# Altium PCB PCB1.PcbDoc
Units mil, origin at the board's own origin, x right, y up, seen from the top; angles counter-clockwise.
Board outline 6000 x 4000 mil, 2 copper layers (Top Layer, Bottom Layer); 11 components, 7 nets, 29 pads, 0 vias.
Unrouted connection lines stored in the file: 16.
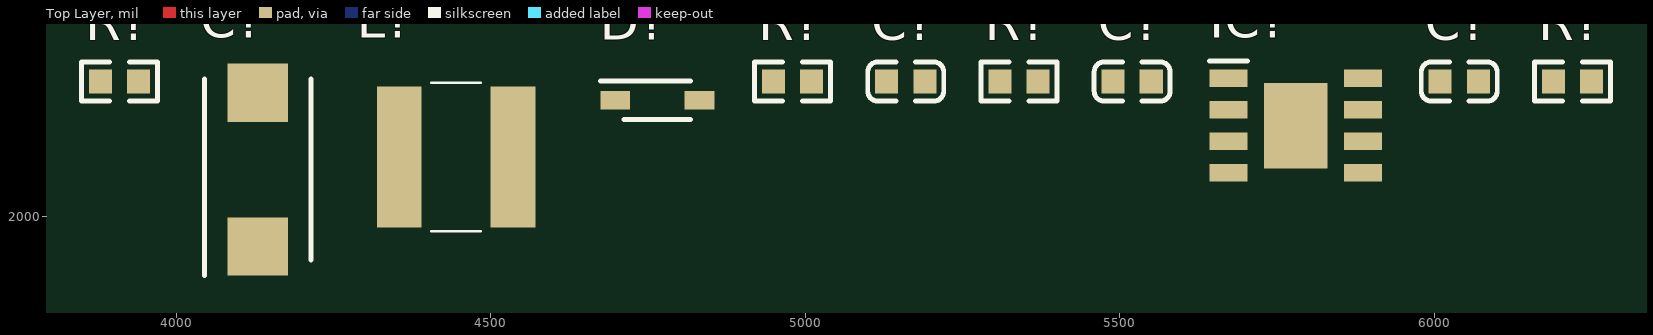
[diagram p0: Top Layer view]
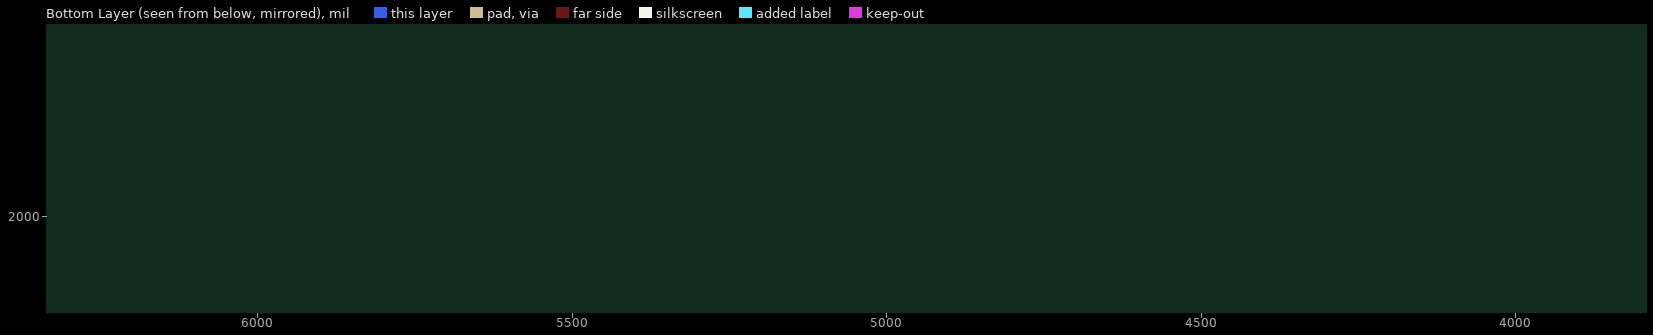
[diagram p1: Bottom Layer view, seen from below]

## Layer stack, top to bottom
Top Solder: solder mask 0.4, Solder Resist, Dk 3.5
Top Layer: signal copper 1.4
Dielectric 1: dielectric 12.6, FR-4, Dk 4.8
Bottom Layer: signal copper 1.4
Bottom Solder: solder mask 0.4, Solder Resist, Dk 3.5

## Board outline
1000,1000 7000,1000 7000,5000 1000,5000

## Design rules (kind name [scope] priority, off if disabled: settings)
Clearance [All] p1: gap=10 ignorepadtopadclearanceinfootprint=FALSE except(0: Arc-Hole Track-Hole SMDPad-Hole THPad-Hole Via-Hole Fill-Hole Poly-Hole Region-Hole Text-Hole)
PolygonConnect [All] p1: connectstyle=Relief reliefconductorwidth=10 reliefentries=4 polygonreliefangle="90 Angle" airgapwidth=10
RoutingVias [All] p1: holewidth=28 width=50 viastyle="Through Hole" minholewidth=28 minwidth=50 maxholewidth=28 maxwidth=50
SolderMaskExpansion [All] p1: expansion=4
Width [All] p1: maxlimit=10 minlimit=10 preferedwidth=10
30 further rules are at their usual default settings.

## Classes and differential pairs
component class Sheet1: C? D? IC? L? R?

## Components (designator, comment, footprint, x,y, rotation, side; value= is the part's Value field where it differs from the comment)
C? "6.8nF (682) 10% 50V" 0603_C 5159.69,2215 r0 top
C? "10uF 4.5V tan" CAPPM7343X310N 4129.69,2075 r90 top
C? "10nF (103) 10% 50V" 0603_C 5519.69,2215 r0 top
C? "100nF (104) 10% 50V" 0603_C 6039.69,2215 r0 top
D? "B130LAW-7-F" SOD3716X145N 4764.69,2185 r0 top
IC? "MP1484EN-LF" SOIC127P600X170-9N 5779.69,2145 r0 top
L? "1040 10UH 5A" 74404064470 4444.69,2095 r0 top
R? "100KΩ (1003) ±1%" 0603_R 6219.69,2215 r0 top
R? "44.2K" 0603_R 4979.69,2215 r0 top
R? "6.8KΩ (6801) ±1%" 0603_R 5339.69,2215 r0 top
R? "10KΩ (1002) ±1%" 0603_R 3909.68,2215 r0 top

## Footprints (in the part's own frame and the unit in brackets; to place one, negate y for a bottom-side part, rotate by r counter-clockwise, add the part's x,y. Pads: shape width x height; smd on the part's side, far side on the other; paste and mask are expansions set on the pad)
0603_C [mm]
  rect 0.93x0.98 smd: 1(-0.77,0) 2(0.77,0)
  silkscreen extent -1.53,-0.79 1.54,0.79, body extent -0.8,-0.4 0.8,0.4, height 0.3
0603_R [mm]
  rect 0.93x0.98 smd: 1(-0.77,0) 2(0.77,0)
  silkscreen extent -1.53,-0.79 1.54,0.79, body extent -0.85,-0.4 0.85,0.4, height 0.56
74404064470 [mm]
  rect 1.8x5.7 smd: 1(-2.3,0) 2(2.3,0)
  silkscreen extent -1,-3 1,3, body extent -3.02,-3 3.02,3, height 4.1
CAPPM7343X310N [mm]
  rect 2.35x2.45 smd: 1(-3.1,0) 2(3.1,0)
  silkscreen extent -4.28,-2.15 3.65,2.15, body extent -3.65,-2.15 3.65,2.15, height 3.1
SOD3716X145N [mm]
  rect 1.2x0.75 smd: 1(-1.7,0) 2(1.7,0)
  silkscreen extent -2.3,-0.77 1.35,0.77, body extent -1.85,-0.77 1.85,0.77, height 1.45
SOIC127P600X170-9N [mm]
  rect 1.525x0.7 smd: 1(-2.712,1.905) 2(-2.712,0.635) 3(-2.712,-0.635) 4(-2.712,-1.905) 5(2.712,-1.905) 6(2.712,-0.635) 7(2.712,0.635) 8(2.712,1.905)
  rect 2.56x3.45 smd: 9(0,0)
  silkscreen extent -3.47,2.61 -1.95,2.61, body extent -3,-2.45 3,2.45, height 1.7

## Part data
C?: library part "0603 6.8nF (682) 10% 50V", "贴片电容", Package=0603, SuppliersPartNumber=C1631, ComponentLink1Description=供应商链接, ComponentLink1URL=http://www.szlcsc.com/product/details_1983.html, Supplier=LC
C?: library part T494D106K035AH, "T494D106K035AH", Manufacturer_Name=Kemet, Mouser Part Number=80-T494D106K035AH, Datasheet Link=http://www.mouser.com/ds/2/212/kemet_kem_t2008_t494-544880.pdf, Height=3.1mm, Manufacturer_Part_Number=T494D106K035AH, Mouser Price/Stock=https://www.mouser.com/Search/Refine.aspx?Keyword=80-T494D106K035AH
C?: library part "0603 10nF (103) 10% 50V", "贴片电容", Package=0603, SuppliersPartNumber=C57112, ComponentLink1Description=供应商链接, ComponentLink1URL=http://www.szlcsc.com/product/details_58143.html, Supplier=LC
C?: library part "0603 100nF (104) 10% 50V", "贴片电容", Package=0603, SuppliersPartNumber=C14663, ComponentLink1Description=供应商链接, ComponentLink1URL=http://www.szlcsc.com/product/details_15331.html, Supplier=LC
D?: "Diode", Manufacturer_Name="Diodes Inc.", Mouser Part Number=621-B130LAW-F, RS Part Number=7513193P, Allied_Number=70437536, Allied Price/Stock=http://www.alliedelec.com/diodes-inc-b130law-7-f/70437536/, Datasheet Link=http://docs-emea.rs-online.com/webdocs/104e/0900766b8104e347.pdf, Height=1.45mm, Manufacturer_Part_Number=B130LAW-7-F, Mouser Price/Stock=https://www.mouser.com/Search/Refine.aspx?Keyword=621-B130LAW-F, RS Price/Stock=http://uk.rs-online.com/web/p/products/7513193P
IC?: "Integrated Circuit", Manufacturer_Name="Monolithic Power Systems (MPS)", Mouser Part Number=946-MP1484ENLF, Datasheet Link=http://www.mouser.com/datasheet/2/277/MP1484-1186021.pdf, Height=1.7mm, Manufacturer_Part_Number=MP1484EN-LF, Mouser Price/Stock=https://www.mouser.com/Search/Refine.aspx?Keyword=946-MP1484ENLF
L?: library part 74404064100, "Inductor", Manufacturer_Name="Wurth Elektronik", Mouser Part Number=710-74404064100, RS Part Number=8142663P, Datasheet Link=https://katalog.we-online.com/pbs/datasheet/74404064100.pdf, Height=4mm, Manufacturer_Part_Number=74404064100, Mouser Price/Stock=https://www.mouser.com/Search/Refine.aspx?Keyword=710-74404064100, RS Price/Stock=http://uk.rs-online.com/web/p/products/8142663P
R?: library part "0603 100KΩ (1003) 1%", "贴片电阻", Package=0603, SuppliersPartNumber=C25803, ComponentLink1Description=供应商链接, ComponentLink1URL=http://www.szlcsc.com/product/details_26546.html, Supplier=LC
R?: library part "0603 1.5KΩ (1501) 1%", "贴片电阻", Package=0603, SuppliersPartNumber=C22843, ComponentLink1Description=供应商链接, ComponentLink1URL=http://www.szlcsc.com/product/details_23570.html, Supplier=LC
R?: library part "0603 6.8KΩ (6801) 1%", "贴片电阻", Package=0603, SuppliersPartNumber=C23212, ComponentLink1Description=供应商链接, ComponentLink1URL=http://www.szlcsc.com/product/details_23939.html, Supplier=LC
R?: library part "0603 10KΩ (1002) 1%", "贴片电阻", Package=0603, SuppliersPartNumber=C25804, ComponentLink1Description=供应商链接, ComponentLink1URL=http://www.szlcsc.com/product/details_26547.html, Supplier=LC

## Nets (pads, with @x,y where several pads share a name; then routed paths per layer and width w, separated by ;. In a path a pad name is that pad's centre, name@x,y a point inside that pad or via, vN(x,y) a via of type N, cw(c..) or ccw(c..) an arc to the next point about the centre after c; other vN are vias at no path point)
5VOUT: C?.1@4129.69,1952.95 L?.1 R?.2@5010,2215
GND: C?.2@4129.69,2197.05 C?.2@6070,2215 D?.2 IC?.4 IC?.9 R?.1@3879.37,2215 R?.2@5370,2215
NetC?_1: C?.1@5489.37,2215 D?.1 IC?.3 L?.2
NetC?_2: C?.2@5550,2215 IC?.1
NetIC?_5: IC?.5 R?.1@4949.37,2215 R?.2@3940,2215
NetIC?_7: IC?.7 R?.2@6250,2215
VCCIN: IC?.2 R?.1@6189.37,2215
pads on no net: C?.1@5129.37,2215 C?.1@6009.37,2215 C?.2@5190,2215 IC?.6 IC?.8 R?.1@5309.37,2215